# EAGLE board przetwornice-panel (EAGLE 5.06)
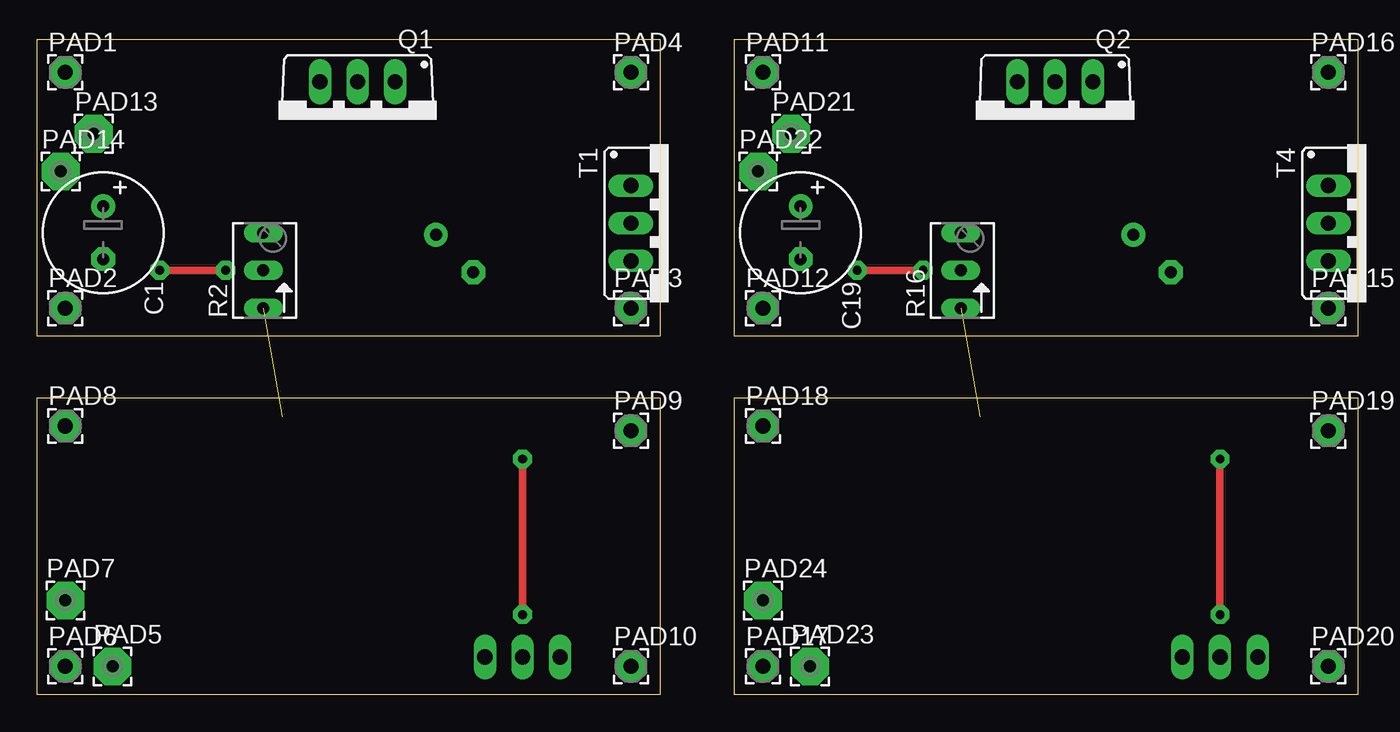
[diagram p0: board, top side]
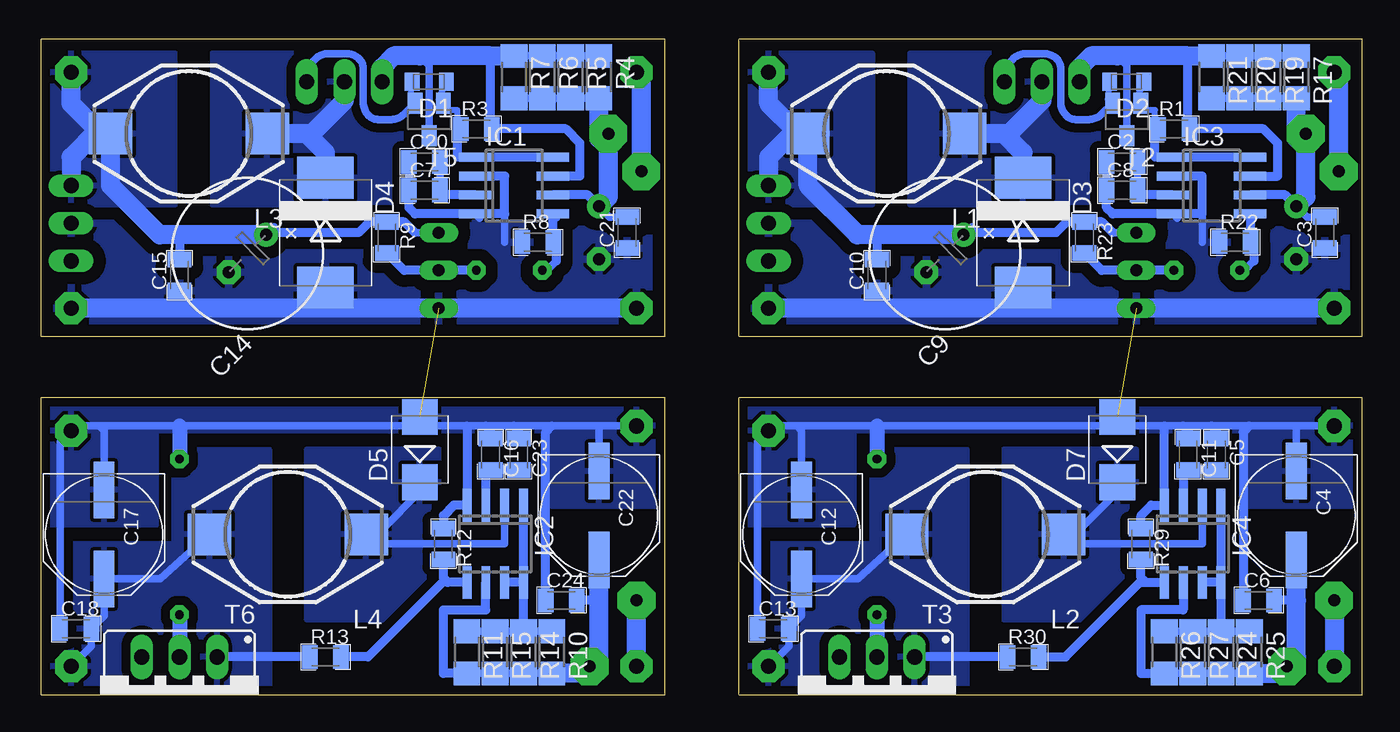
[diagram p1: board, bottom side, seen from below]

Size 88.99 x 44.13 mm. Coordinates in mm from the lower left corner, seen from the top.
Outline: 0,24.13 0,44.13 42,44.13 42,24.13 0,24.13
Outline: 0,0 0,20 42,20 42,0 0,0
Outline: 46.99,24.13 46.99,44.13 88.99,44.13 88.99,24.13 46.99,24.13
Outline: 46.99,0 46.99,20 88.99,20 88.99,0 46.99,0
Copper layers (1*16): Top 0.035mm / dielectric 1.5mm / Bottom 0.035mm
Design rules "default *": minimum track width 10mil, minimum drill 0.5mm, track to track 8mil, track to pad 8mil, pad to pad 8mil, via to via 8mil, smd to smd 8mil, copper to edge 20mil, drill to drill 8mil, minimum pad ring 10mil, minimum via ring 8mil, stop-mask expansion 4mil, vias tented up to drill 0mil, thermal gap 10mil

## Footprints (pad centres in the part's own frame; a part is rotated, then mirrored left to right if it is on the bottom)
E3,5-8 = drill 0.813 pad 1.6 round: + -1.778,0 | drill 0.813 pad 1.6 octagon: - 1.778,0
0805 = smd 1.044 x 1.6: 1 -1.048,0; 2 1.048,0
PANASONIC_E = smd 3.8 x 1.4: + 3,0; - -3,0
E3,5-10 = drill 0.813 pad 1.6 round: + -1.778,0 | drill 0.813 pad 1.6 octagon: - 1.778,0
SOD110-W = smd 1 x 1.2: A 1.15,0; C -1.15,0
SMC = smd 2.8 x 3.8: A 3.7,0; C -3.7,0
SMB = smd 2.4 x 2.4: A 2.2,0; C -2.2,0
SOIC8 = smd 0.6 x 2.2: 1 -1.905,-2.6; 2 -0.635,-2.6; 3 0.635,-2.6; 4 1.905,-2.6; 5 1.905,2.6; 6 0.635,2.6; 7 -0.635,2.6; 8 -1.905,2.6
DO3316P = smd 2.92 x 2.79: 1 -5.28,0; 2 5.28,0
2,15/1,0 = drill 1.016 pad 2.159 octagon: 1 0,0
2,54/0,8 = drill 0.813 pad 2.54 octagon: 1 0,0
TO220BV = drill 1.016 long: D 0,-2.54; G -2.54,-2.54; S 2.54,-2.54
B64Y = drill 0.813 long: A 2.54,0; E -2.54,0; S 0,0
R1206 = smd 1.6 x 1.803: 1 -1.422,0; 2 1.422,0
TO220CS = drill 1.016 long: A 0,-2.54; C -2.54,-2.54; G 2.54,-2.54
SOT23-BEC = smd 1 x 1.4: B -0.95,-1.1; C 0,1.1; E 0.95,-1.1

## Placement (x,y rotation side)
C1  [E3,5-8]  4.45,31.11 270 top
C2  [0805]  16.19,35.88 0 bottom
C3  [0805]  2.54,31.11 90 bottom
C4  [PANASONIC_E]  4.45,12.06 270 bottom
C5  [0805]  9.84,16.19 270 bottom
C6  [0805]  6.99,6.35 0 bottom
C7  [0805]  63.18,33.97 0 bottom
C8  [0805]  16.19,33.97 0 bottom
C9  [E3,5-10]  28.13,29.71 225 bottom
C10  [0805]  32.7,28.26 90 bottom
C11  [0805]  11.75,16.19 270 bottom
C12  [PANASONIC_E]  37.78,10.79 270 bottom
C13  [0805]  39.69,4.45 0 bottom
C14  [E3,5-10]  75.12,29.71 225 bottom
C15  [0805]  79.69,28.26 90 bottom
C16  [0805]  58.74,16.19 270 bottom
C17  [PANASONIC_E]  84.77,10.79 270 bottom
C18  [0805]  86.68,4.45 0 bottom
C19  [E3,5-8]  51.44,31.11 270 top
C20  [0805]  63.18,35.88 0 bottom
C21  [0805]  49.53,31.11 90 bottom
C22  [PANASONIC_E]  51.44,12.06 270 bottom
C23  [0805]  56.83,16.19 270 bottom
C24  [0805]  53.98,6.35 0 bottom
D1  LL4148  [SOD110-W]  62.87,41.27 180 bottom
D2  LL4148  [SOD110-W]  15.88,41.27 180 bottom
D3  [SMC]  22.86,31.11 270 bottom
D4  [SMC]  69.85,31.11 270 bottom
D5  [SMB]  63.5,16.51 90 bottom
D7  [SMB]  16.51,16.51 90 bottom
IC1  MC34063AD  [SOIC8]  57.15,34.29 270 bottom
IC2  MC34063AD  [SOIC8]  58.42,10.16 180 bottom
IC3  MC34063AD  [SOIC8]  10.16,34.29 270 bottom
IC4  MC34063AD  [SOIC8]  11.43,10.16 180 bottom
L1  [DO3316P]  32.07,37.78 180 bottom
L2  [DO3316P]  25.4,10.79 180 bottom
L3  [DO3316P]  79.06,37.78 180 bottom
L4  [DO3316P]  72.39,10.79 180 bottom
PAD1  [2,15/1,0]  1.91,41.91 0 top
PAD2  [2,15/1,0]  1.91,26.04 0 top
PAD3  [2,15/1,0]  40.01,26.04 0 top
PAD4  [2,15/1,0]  40.01,41.91 0 top
PAD5  [2,54/0,8]  5.08,1.9 0 top
PAD6  [2,15/1,0]  1.91,1.9 0 top
PAD7  [2,54/0,8]  1.91,6.35 0 top
PAD8  [2,15/1,0]  1.91,18.1 0 top
PAD9  [2,15/1,0]  40.01,17.78 0 top
PAD10  [2,15/1,0]  40.01,1.9 0 top
PAD11  [2,15/1,0]  48.9,41.91 0 top
PAD12  [2,15/1,0]  48.9,26.04 0 top
PAD13  [2,54/0,8]  3.81,37.78 0 top
PAD14  [2,54/0,8]  1.59,35.24 0 top
PAD15  [2,15/1,0]  87,26.04 0 top
PAD16  [2,15/1,0]  87,41.91 0 top
PAD17  [2,15/1,0]  48.9,1.9 0 top
PAD18  [2,15/1,0]  48.9,18.1 0 top
PAD19  [2,15/1,0]  87,17.78 0 top
PAD20  [2,15/1,0]  87,1.9 0 top
PAD21  [2,54/0,8]  50.8,37.78 0 top
PAD22  [2,54/0,8]  48.58,35.24 0 top
PAD23  [2,54/0,8]  52.07,1.9 0 top
PAD24  [2,54/0,8]  48.9,6.35 0 top
Q1  IRF9530  [TO220BV]  21.59,38.73 180 top
Q2  IRF9530  [TO220BV]  68.58,38.73 180 top
R1  2k2  [0805]  12.7,38.1 0 bottom
R2  [B64Y]  15.24,28.57 90 top
R3  2k2  [0805]  59.69,38.1 0 bottom
R4  ??  [R1206]  51.44,41.59 270 bottom
R5  ??  [R1206]  53.34,41.59 270 bottom
R6  ??  [R1206]  55.24,41.59 270 bottom
R7  ??  [R1206]  57.15,41.59 270 bottom
R8  [0805]  55.56,30.48 0 bottom
R9  [0805]  65.72,30.8 270 bottom
R10  ??  [R1206]  54.61,2.86 270 bottom
R11  ??  [R1206]  60.33,2.86 270 bottom
R12  [0805]  61.91,10.16 270 bottom
R13  [0805]  69.85,2.54 0 bottom
R14  ??  [R1206]  56.52,2.86 270 bottom
R15  ??  [R1206]  58.42,2.86 270 bottom
R16  [B64Y]  62.23,28.57 90 top
R17  ??  [R1206]  4.45,41.59 270 bottom
R19  ??  [R1206]  6.35,41.59 270 bottom
R20  ??  [R1206]  8.26,41.59 270 bottom
R21  ??  [R1206]  10.16,41.59 270 bottom
R22  [0805]  8.57,30.48 0 bottom
R23  [0805]  18.73,30.8 270 bottom
R24  ??  [R1206]  9.53,2.86 270 bottom
R25  ??  [R1206]  7.62,2.86 270 bottom
R26  ??  [R1206]  13.34,2.86 270 bottom
R27  ??  [R1206]  11.43,2.86 270 bottom
R29  [0805]  14.92,10.16 270 bottom
R30  [0805]  22.86,2.54 0 bottom
T1  BTW58  [TO220CS]  42.55,31.75 270 top
T2  MMBT3904  [SOT23-BEC]  15.88,38.73 180 bottom
T3  BTW58  [TO220CS]  32.7,0 180 bottom
T4  BTW58  [TO220CS]  89.53,31.75 270 top
T5  MMBT3904  [SOT23-BEC]  62.87,38.73 180 bottom
T6  BTW58  [TO220CS]  79.69,0 180 bottom

## Library data of the parts
C1 C4 C9 C12 C14 C17 C19 C22 = rcl
C2 C3 C5-C8 C10 C11 C13 C15 C16 C18 C20 C21 C23 C24 R1 R3 R8 R9 R12 R13 R22 R23 R29 R30 = barobot
D1-D5 D7 = diode
IC1-IC4 = mc34063
L1-L4 = inductor-coilcraft
PAD1-PAD24 = wirepad
Q1 Q2 = transistor-power
R2 R16 = pot
R4-R7 R10 R11 R14 R15 R17 R19-R21 R24-R27 = resistor
T1 T3 T4 T6 = triac
T2 T5 = transistor

## Nets
CHOKE1: D3.C L1.1 Q1.D
CHOKE2: D7.C IC4.2 L2.1
CHOKE3: D4.C L3.1 Q2.D
CHOKE4: D5.C IC2.2 L4.1
GND: C1.- C2.1 C3.1 C4.- C5.1 C6.1 C8.1 C9.- C10.1 C11.1 C12.- C13.1 D3.A D7.A IC3.2 IC3.4 IC4.4 PAD2.1 PAD3.1 PAD8.1 PAD9.1 R2.E R22.1 R29.1 T1.A T3.A
GND1: C7.1 C14.- C15.1 C16.1 C17.- C18.1 C19.- C20.1 C21.1 C22.- C23.1 C24.1 D4.A D5.A IC1.2 IC1.4 IC2.4 PAD12.1 PAD15.1 PAD18.1 PAD19.1 R8.1 R12.1 R16.E T4.A T6.A
N$1: D2.C IC3.1 IC3.8 R1.1 T2.B
N$2: C1.+ C3.2 IC3.6 PAD13.1 R17.2 R19.2 R20.2 R21.2
N$3: C4.+ C6.2 IC4.6 PAD5.1 R24.2 R25.2 R26.2 R27.2
N$4: IC1.7 Q2.S R3.2 R4.1 R5.1 R6.1 R7.1 T5.C
N$5: PAD1.1 PAD14.1
N$6: IC1.5 R8.2 R9.2 R16.S
N$7: PAD6.1 PAD7.1
N$8: C7.2 C20.2 IC1.3
N$9: D1.A Q2.G T5.E
N$10: D1.C IC1.1 IC1.8 R3.1 T5.B
N$11: IC2.1 IC2.7 IC2.8 R10.1 R11.1 R14.1 R15.1
N$12: IC2.5 R12.2 R13.2
N$13: C16.2 C23.2 IC2.3
N$14: C19.+ C21.2 IC1.6 PAD21.1 R4.2 R5.2 R6.2 R7.2
N$15: C22.+ C24.2 IC2.6 PAD23.1 R10.2 R11.2 R14.2 R15.2
N$16: IC3.7 Q1.S R1.2 R17.1 R19.1 R20.1 R21.1 T2.C
N$17: PAD11.1 PAD22.1
N$18: PAD17.1 PAD24.1
N$23: IC3.5 R2.S R22.2 R23.2
N$29: C2.2 C8.2 IC3.3
N$30: IC4.1 IC4.7 IC4.8 R24.1 R25.1 R26.1 R27.1
N$31: IC4.5 R29.2 R30.2
N$32: D2.A Q1.G T2.E
N$44: C5.2 C11.2 IC4.3
OUT1: C17.+ C18.2 L4.2 PAD20.1 R13.1 T6.C
OUT2: C12.+ C13.2 L2.2 PAD10.1 R30.1 T3.C
VCC: C9.+ C10.2 L1.2 PAD4.1 R2.A R23.1 T1.C
VCC1: C14.+ C15.2 L3.2 PAD16.1 R9.1 R16.A T4.C

## Tracks (layer width: path | path; a pad name or v marks a point on that pad's centre or on a via)
CHOKE1
  Bottom 1.27: Q1.D 21.59,40 23.81,37.78 24.13,37.78 | 24.13,37.78 L1.1 | D3.C 22.86,36.51 24.13,37.78
  pour Bottom (isolate 0.61): 17.78,43.18 30.48,43.18 30.48,33.02 17.78,33.02
CHOKE2
  Bottom 0.508: IC4.2 10.79,10.16 19.05,10.16 19.05,11.11 | D7.C 16.51,13.65 19.05,11.11 | 19.05,11.11 L2.1
  pour Bottom (isolate 0.61): 15.24,16.51 24.13,16.51 24.13,5.08 15.24,5.08
CHOKE3
  Bottom 1.27: Q2.D 68.58,40 70.8,37.78 71.12,37.78 | 71.12,37.78 L3.1 | D4.C 69.85,36.51 71.12,37.78
  pour Bottom (isolate 0.61): 64.77,43.18 77.47,43.18 77.47,33.02 64.77,33.02
CHOKE4
  Bottom 0.508: IC2.2 57.78,10.16 66.04,10.16 66.04,11.11 | D5.C 63.5,13.65 66.04,11.11 | 66.04,11.11 L4.1
  pour Bottom (isolate 0.61): 62.23,16.51 71.12,16.51 71.12,5.08 62.23,5.08
GND  (via drill 0.6 pad 1.27)  (1 unrouted)
  Top 0.508: v32.7,15.87 v32.7,5.4
  Bottom 0.508: IC3.4 12.48,32.1 | C8.1 C2.1 | 31.43,26.04 C10.1 | 10.79,30.48 10.79,32.38 | 4.45,18.1 PAD8.1 | 4.45,18.1 7.62,18.1 10.16,18.1 12.06,18.1 13.34,18.1 16.19,18.1 | 16.19,18.1 32.7,18.1 38.1,18.1 | 38.1,18.1 39.69,18.1 PAD9.1 40.73,17.05 C13.1 | D7.A 16.19,18.39 16.19,18.1 | 4.45,18.1 C4.- | C12.- 37.78,17.78 38.1,18.1
  Bottom 0.61: IC3.2 10.79,34.92 10.79,32.38 IC3.4 16.83,32.38 17.24,32.8 C8.1 | R29.1 14.92,12.06 14.23,12.76 IC4.4 13.34,18.1 | C6.1 8.03,17.68 7.62,18.1 | C11.1 11.75,17.78 12.06,18.1 | C5.1 9.84,17.78 10.16,18.1
  Bottom 1.016: v32.7,5.4 T3.A | 32.7,18.1 v32.7,15.87
  Bottom 1.27: PAD2.1 31.43,26.04 PAD3.1
  pour Bottom (isolate 0.813): 0,31.75 41.91,31.75 41.91,24.13 0,24.13
  pour Bottom (isolate 0.61): 0,20.32 0,12.7 7.62,12.7 7.62,17.78 34.29,17.78 34.29,11.43 41.91,11.43 41.91,20.32
GND1  (via drill 0.6 pad 1.27)  (1 unrouted)
  Top 0.508: v79.69,15.87 v79.69,5.4
  Bottom 0.508: IC1.4 59.47,32.1 | C7.1 C20.1 | 78.42,26.04 C15.1 | 57.78,30.48 57.78,32.38 | 51.44,18.1 PAD18.1 | 51.44,18.1 54.61,18.1 57.15,18.1 59.05,18.1 60.33,18.1 63.18,18.1 | 63.18,18.1 79.69,18.1 85.09,18.1 | 85.09,18.1 86.68,18.1 PAD19.1 87.72,17.05 C18.1 | D5.A 63.18,18.39 63.18,18.1 | 51.44,18.1 C22.- | C17.- 84.77,17.78 85.09,18.1
  Bottom 0.61: IC1.2 57.78,34.92 57.78,32.38 IC1.4 63.82,32.38 64.23,32.8 C7.1 | R12.1 61.91,12.06 61.22,12.76 IC2.4 60.33,18.1 | C24.1 55.02,17.68 54.61,18.1 | C16.1 58.74,17.78 59.05,18.1 | C23.1 56.83,17.78 57.15,18.1
  Bottom 1.016: v79.69,5.4 T6.A | 79.69,18.1 v79.69,15.87
  Bottom 1.27: PAD12.1 78.42,26.04 PAD15.1
  pour Bottom (isolate 0.813): 46.99,31.75 88.9,31.75 88.9,24.13 46.99,24.13
  pour Bottom (isolate 0.61): 46.99,20.32 46.99,12.7 54.61,12.7 54.61,17.78 81.28,17.78 81.28,11.43 88.9,11.43 88.9,20.32
N$1
  Bottom 0.406: T2.B 15.24,40 | T2.B 15.24,39.37 13.97,39.37 13.97,38.73 | 15.24,40 D2.C | T2.B 15.24,40
  Bottom 0.508: R1.1 13.75,38.51 13.97,38.73
  Bottom 0.61: IC3.8 IC3.1 13.97,36.2 13.97,38.73
N$2
  Bottom 0.508: C3.2 3.71,32.16 C1.+ | R17.2 R19.2 R20.2 R21.2
  Bottom 0.61: IC3.6 5.21,33.66 C1.+
  Bottom 1.27: 4.45,38.1 4.45,37.47 | 4.45,38.1 R17.2 | C1.+ 3.81,33.53 PAD13.1 4.13,38.1 4.45,38.1
N$3
  Bottom 0.508: R26.2 R27.2 R24.2 R25.2
  Bottom 0.61: IC4.6 12.06,5.71 14.92,5.71 14.92,1.43 R26.2 | 4.45,6.35 C6.2
  Bottom 1.27: C4.+ 4.45,6.35 4.45,2.54 PAD5.1 5.55,1.43 R25.2
N$4
  Bottom 0.508: R4.1 R5.1 R6.1 R7.1 | T5.C 62.87,42.38 63.5,43.01 | R3.2 58.64,38.64 58.74,38.73
  Bottom 0.61: IC1.7 52.7,34.92 52.7,37.15 53.66,38.1 R3.2 | 58.74,38.73 58.74,43.01
  Bottom 1.27: R7.1 58.74,43.01 63.5,43.01 65.25,43.01 66.04,42.23 Q2.S
N$5
  Bottom 1.27: PAD14.1 1.59,41.59 PAD1.1
N$6  (via drill 0.6 pad 1.27)
  Top 0.508: v55.24,28.57 v59.69,28.57
  Bottom 0.508: 54.29,32.13 IC1.5 54.52,32.35 | v55.24,28.57 54.93,28.57 54.29,29.21 | 54.29,30.26 R8.2
  Bottom 0.61: v59.69,28.57 R16.S 64.55,28.57 R9.2 | 54.29,29.21 54.29,30.26 | R8.2 54.52,32.35
N$7
  Bottom 1.27: PAD7.1 PAD6.1
N$8
  Bottom 0.508: C20.2 C7.2 61.82,33.66
  Bottom 0.61: IC1.3 61.82,33.66
N$9
  Bottom 0.406: T5.E 64.14,40 D1.A
  Bottom 0.508: Q2.G 71.12,42.23 70.54,42.81 arc45 69.64,43.18 68.47,43.18 arc45 67.57,42.81 arc45 67.31,42.17 67.31,39.9 arc-45 66.94,39 arc-45 66.3,38.73 65.41,38.73 arc-45 64.57,39.08 T5.E
N$10
  Bottom 0.406: 60.96,38.73 60.96,39.37 62.23,39.37 T5.B 62.23,40 D1.C
  Bottom 0.508: R3.1 60.74,38.51 60.96,38.73
  Bottom 0.61: IC1.8 IC1.1 60.96,36.2 60.96,38.73
N$11
  Bottom 0.508: R10.1 R14.1 R15.1 R11.1
  Bottom 0.61: IC2.8 IC2.1 | IC2.8 IC2.7 | R14.1 IC2.8
N$12
  Bottom 0.61: 61.59,7.56 61.97,7.56 66.99,2.54 R13.2 | IC2.5 61.59,7.56 | R12.2 61.91,7.88 61.59,7.56
N$13
  Bottom 0.61: IC2.3 59.05,14.83 C16.2 C23.2
N$14
  Bottom 0.508: C21.2 50.7,32.16 C19.+ | R4.2 R5.2 R6.2 R7.2
  Bottom 0.61: IC1.6 52.2,33.66 C19.+
  Bottom 1.27: 51.44,38.1 51.44,37.47 | 51.44,38.1 R4.2 | C19.+ 50.8,33.53 PAD21.1 51.12,38.1 51.44,38.1
N$15
  Bottom 0.508: R11.2 R15.2 R14.2 R10.2
  Bottom 0.61: IC2.6 59.05,5.71 61.91,5.71 61.91,1.43 R11.2 | 51.44,6.35 C24.2
  Bottom 1.27: C22.+ 51.44,6.35 51.44,2.54 PAD23.1 52.54,1.43 R10.2
N$16
  Bottom 0.508: R17.1 R19.1 R20.1 R21.1 | T2.C 15.88,42.38 16.51,43.01 | R1.2 11.65,38.64 11.75,38.73
  Bottom 0.61: IC3.7 5.71,34.92 5.71,37.15 6.67,38.1 R1.2 | 11.75,38.73 11.75,43.01
  Bottom 1.27: R21.1 11.75,43.01 16.51,43.01 18.26,43.01 19.05,42.23 Q1.S
N$17
  Bottom 1.27: PAD22.1 48.58,41.59 PAD11.1
N$18
  Bottom 1.27: PAD17.1 PAD24.1
N$23  (via drill 0.6 pad 1.27)
  Top 0.508: v8.26,28.57 v12.7,28.57
  Bottom 0.508: 7.3,32.13 IC3.5 7.53,32.35 | v8.26,28.57 7.94,28.57 7.3,29.21 | R22.2 7.3,30.26
  Bottom 0.61: v12.7,28.57 R2.S 17.56,28.57 R23.2 | 7.3,30.26 7.3,29.21 | R22.2 7.53,32.35
N$29
  Bottom 0.508: C2.2 C8.2 14.83,33.66
  Bottom 0.61: IC3.3 14.83,33.66
N$30
  Bottom 0.508: R25.1 R24.1 R27.1 R26.1
  Bottom 0.61: IC4.1 IC4.8 | IC4.8 IC4.7 | IC4.8 R24.1
N$31
  Bottom 0.61: 14.61,7.56 14.98,7.56 20,2.54 R30.2 | 14.61,7.56 IC4.5 | R29.2 14.92,7.88 14.61,7.56
N$32
  Bottom 0.406: T2.E 17.14,40 D2.A
  Bottom 0.508: Q1.G 24.13,42.23 23.55,42.81 arc45 22.65,43.18 21.48,43.18 arc45 20.58,42.81 arc45 20.32,42.17 20.32,40 20.32,39.9 arc-45 19.95,39 arc-45 19.31,38.73 18.41,38.73 arc-45 17.58,39.08 T2.E
N$44
  Bottom 0.61: IC4.3 12.06,14.83 C11.2 C5.2
OUT1
  Bottom 0.508: 77.15,10.59 L4.2 80.99,7.79 C17.+ 84.77,5.3 C18.2 85.63,3.27 PAD20.1
  Bottom 0.61: R13.1 T6.C
  pour Bottom (isolate 0.61): 73.66,16.51 73.66,0 88.9,0 88.9,10.16 80.01,10.16 80.01,16.51
OUT2
  Bottom 0.508: 30.16,10.59 L2.2 34,7.79 C12.+ 37.78,5.3 C13.2 38.64,3.27 PAD10.1
  Bottom 0.61: R30.1 T3.C
  pour Bottom (isolate 0.61): 26.67,16.51 26.67,0 41.91,0 41.91,10.16 33.02,10.16 33.02,16.51
VCC
  Bottom 0.508: 26.31,31.53 C9.+ 26.72,31.11 | R2.A 16.83,31.11
  Bottom 0.61: 32.7,30.97 C10.2 | 16.83,31.11 17.56,31.84 R23.1 19.91,31.84 20.64,31.11 26.72,31.11
  Bottom 1.27: 38.2,38 L1.2 37.35,34.29 34.03,30.97 32.7,30.97 C9.+ | 38.2,38 40.01,39.8 PAD4.1 | T1.C 40.01,36.2 38.2,38
  pour Bottom (isolate 0.61): 33.02,43.18 41.91,43.18 41.91,33.02 33.02,33.02
VCC1
  Bottom 0.508: 73.3,31.53 C14.+ 73.71,31.11 | R16.A 63.82,31.11
  Bottom 0.61: 79.69,30.97 C15.2 | 63.82,31.11 64.55,31.84 R9.1 66.9,31.84 67.63,31.11 73.71,31.11
  Bottom 1.27: 85.19,38 L3.2 84.34,34.29 81.02,30.97 79.69,30.97 C14.+ | 85.19,38 87,39.8 PAD16.1 | T4.C 87,36.2 85.19,38
  pour Bottom (isolate 0.61): 80.01,43.18 88.9,43.18 88.9,33.02 80.01,33.02